# Altium PCB 电子脚铐手表主控板V3.PcbDoc
Units mm, origin at the board's own origin, x right, y up, seen from the top; angles counter-clockwise.
Board outline 36 x 30 mm, 2 copper layers (Top Layer, Bottom Layer), stack 1.071 mm thick; 57 components, 41 nets, 197 pads, 33 vias.
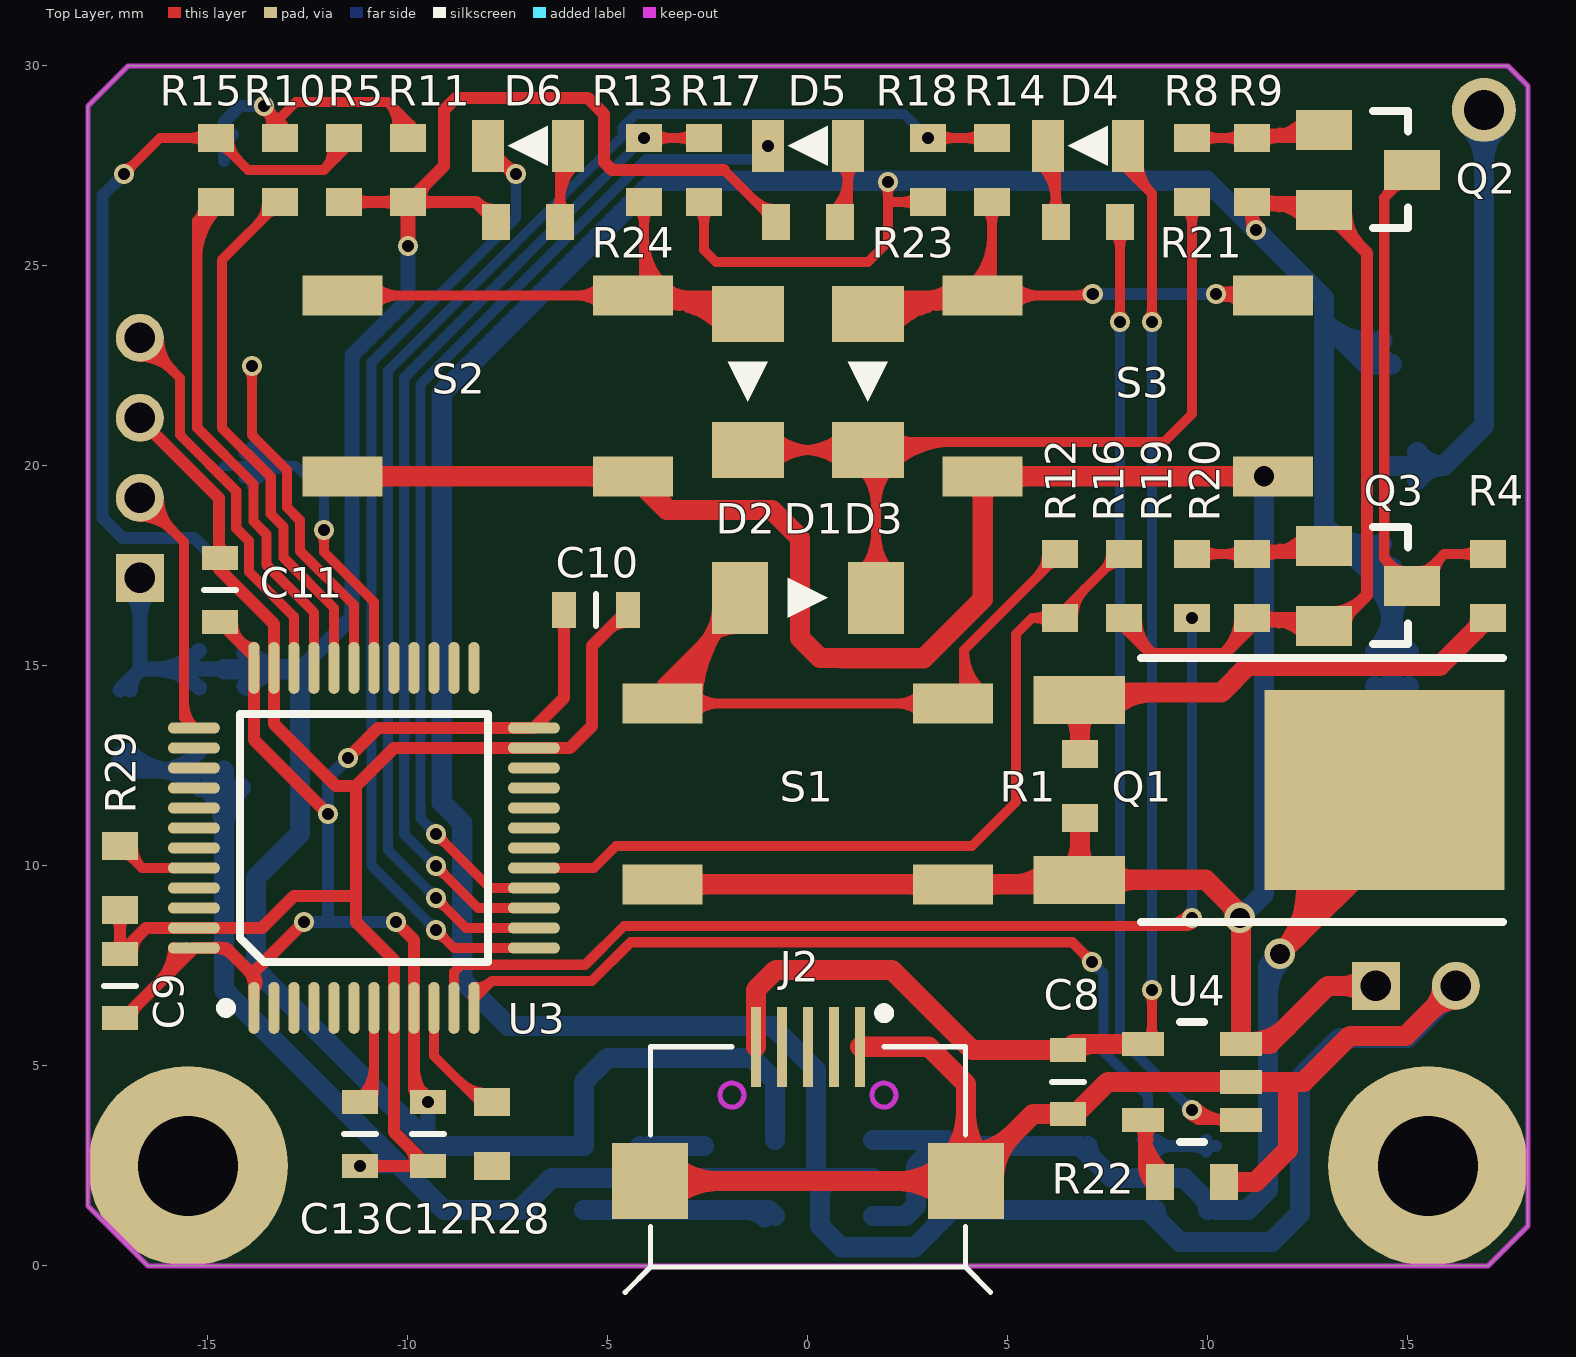
[diagram p0: Top Layer view]
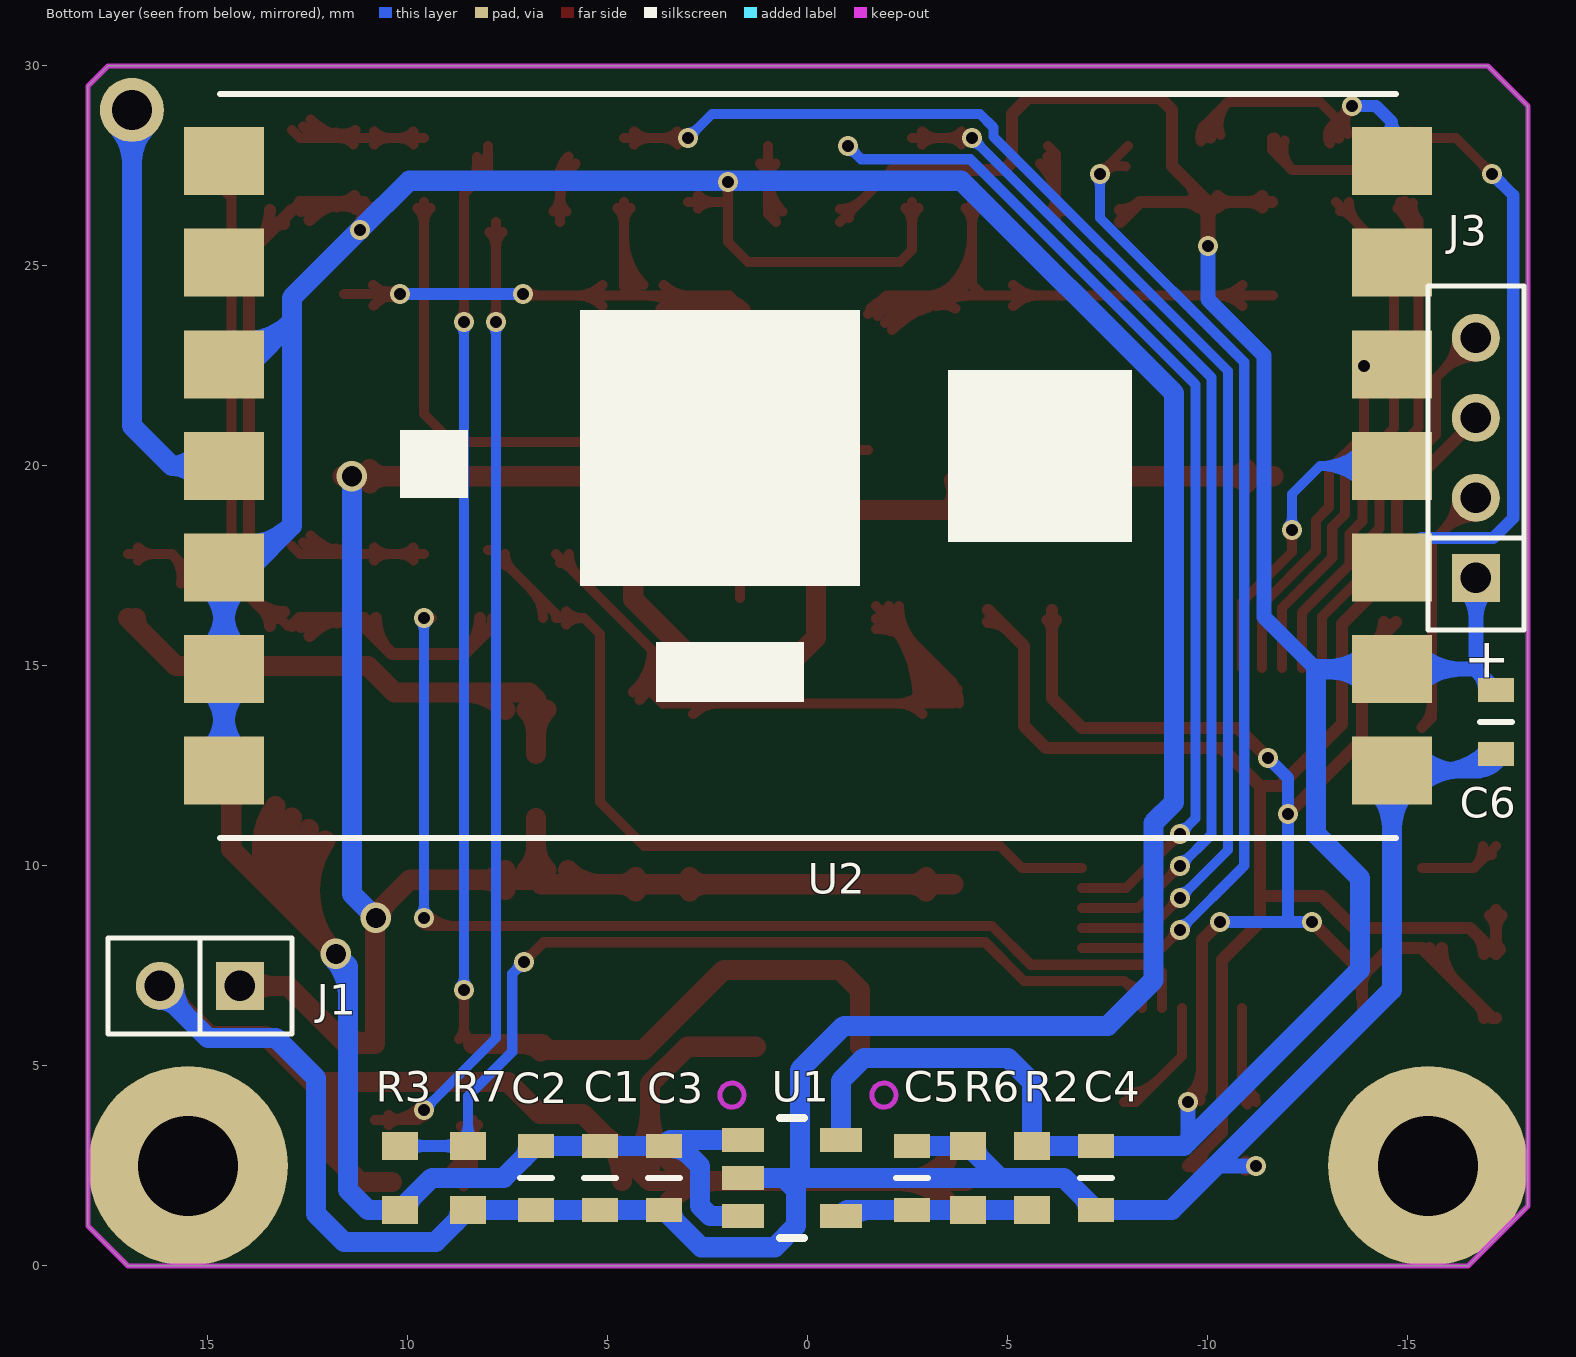
[diagram p1: Bottom Layer view, seen from below]
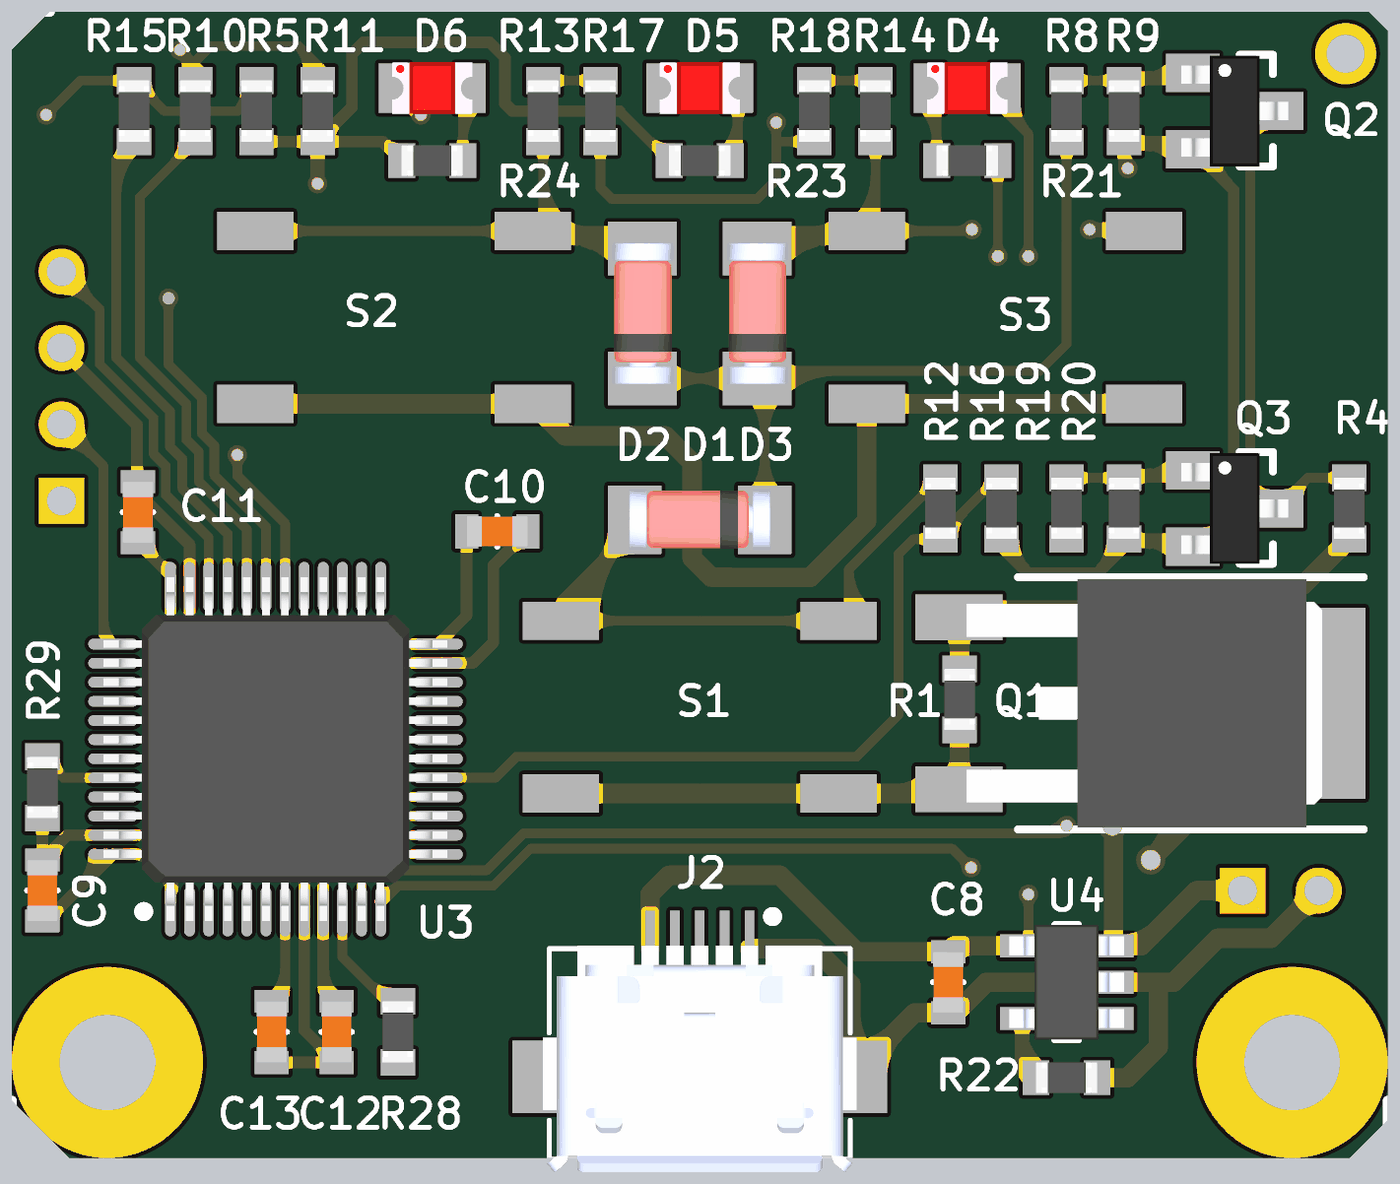
[diagram p2: 3D render of the assembled board from above, using the file's embedded part models]
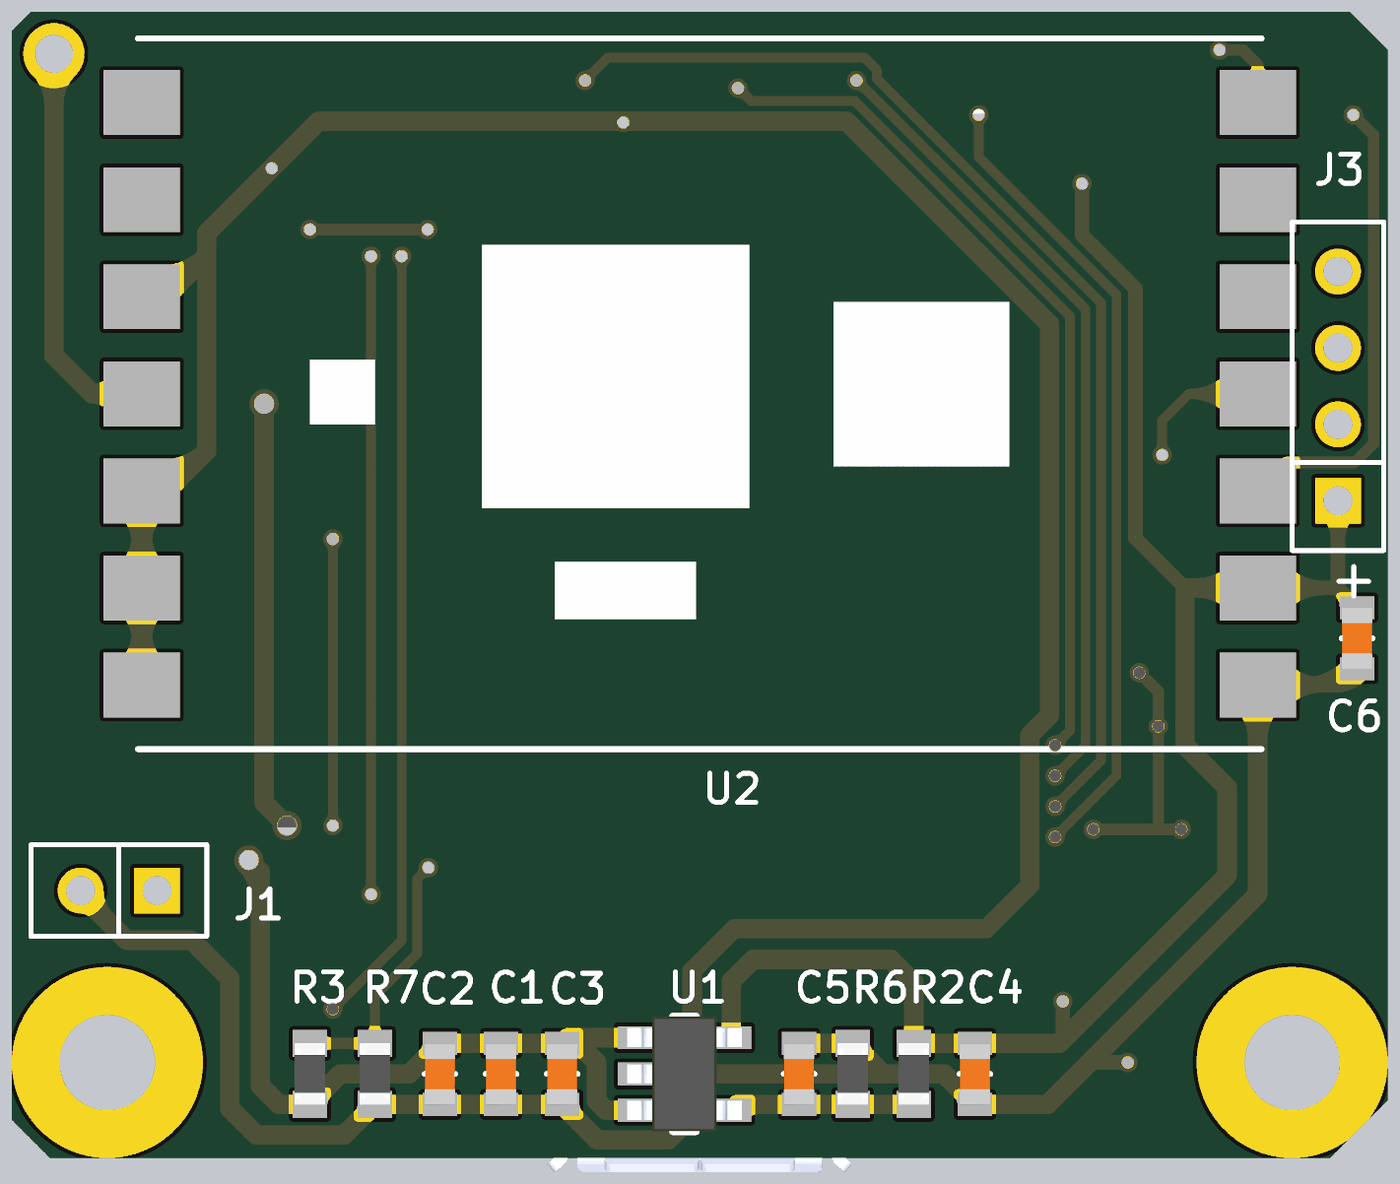
[diagram p3: 3D render of the assembled board from below, using the file's embedded part models]

## Layer stack, top to bottom
Top Solder: solder mask 0.0102, Solder Resist, Dk 3.5
Top Layer: signal copper 0.0356
Dielectric 1: dielectric 1, FR-4, Dk 4.8
Bottom Layer: signal copper 0.0356
Bottom Solder: solder mask 0.0102, Solder Resist, Dk 3.5

## Board outline
-18,1.5 -16.5,0 17,0 18,1 18,29.5 17.5,30 -17,30 -18,29

## Design rules (kind name [scope] priority, off if disabled: settings)
Clearance [All] p1: gap=0.152
ComponentClearance [All] p1: gap=0 collisioncheckmode=3 verticalgap=0 showdistances=FALSE
Height [All] p1: minheight=0 maxheight=50.8 prefheight=12.7
HoleSize [All] p1: absolutevalues=TRUE maxlimit=5.08 minlimit=0.025 maxpercent=80.000 minpercent=20.000
HoleToHoleClearance [All] p1: gap=0.152 allowstackedmicrovias=TRUE
MinimumSolderMaskSliver [All] p1: minsoldermaskwidth=0
PlaneConnect [All] p1: planeconnectstyle=Direct reliefexpansion=0.508 reliefentries=4 reliefconductorwidth=0.254 reliefairgap=0.254
PolygonConnect [All] p1: connectstyle=Direct reliefconductorwidth=0.254 reliefentries=4 polygonreliefangle="90 Angle" airgapwidth=0.254
RoutingVias [All] p1: holewidth=0.711 width=1.27 viastyle="Through Hole" minholewidth=0.203 minwidth=0.305 maxholewidth=5.08 maxwidth=7.62
SilkToSilkClearance [All] p1: silktosilkclearance=0
SilkToSolderMaskClearance [IsPad] p1: minsilkscreentomaskgap=0 clearancetoexposedcopper=TRUE
SolderMaskExpansion [All] p1: expansion=0.102
Width [All] p1: maxlimit=0.508 minlimit=0.254 preferedwidth=0.254
21 further rules are at their usual default settings.

## Components (designator, comment, footprint, x,y, rotation, side; value= is the part's Value field where it differs from the comment)
C1 "10uF" C0603 5.2,2.2 r270 bottom locked
C2 "10uF" C0603 6.8,2.2 r270 bottom locked
C3 "0.1uF" C0603 3.6,2.2 r90 bottom locked
C4 "10uF" C0603 -7.2,2.2 r270 bottom locked
C5 "470pF" C0603 -2.6,2.2 r90 bottom locked
C6 "10uF" C0603 -17.2,13.6 r270 bottom locked
C8 "Cap" C0603 6.5,4.6 r270 top locked
C9 "0.1uF" C0603 -17.2,7 r90 top locked
C10 "0.1uF" C0603 -5.3,16.4 r0 top locked
C11 "0.1uF" C0603 -14.7,16.9 r90 top locked
C12 "0.1uF" C0603 -9.5,3.3 r270 top locked
C13 "0.1uF" C0603 -11.2,3.3 r270 top locked
D1 "1N4148" SOD-80-S 0,16.7 r0 top locked
D2 "1N4148" SOD-80-S -1.5,22.1 r270 top locked
D3 "1N4148" SOD-80-S 1.5,22.1 r270 top locked
D4 "LED-G" LED0805 7,28 r180 top locked
D5 "LED" LED0805 0,28 r180 top locked
D6 "LED" LED0805 -7,28 r180 top locked
J1 "Jack 1x2" Jk1*2-2.0 15.2,7 r0 bottom locked
J2 "MicroUSB" MICRO-USB 0,3.8 r180 top locked
J3 "SHD1X4-2.00" Jk1*4-2.0 -16.7,20.2 r90 bottom locked
Q1 "2SA1615" TO-252 10.6,11.901 r270 top locked
Q2 "S8050" SOT-23 14,27.4 r270 top locked
Q3 "S8050" SOT-23 14,17 r270 top locked
R1 "200K" R0603 6.8,12 r90 top locked
R2 "100K" R0603 -5.6,2.2 r90 bottom locked
R3 "200K" R0603 10.2,2.2 r90 bottom locked
R4 "1K" R0603 17,17 r270 top locked
R5 "200K" R0603 -11.6,27.4 r270 top locked
R6 "160K" R0603 -4,2.2 r90 bottom locked
R7 "100K" R0603 8.5,2.2 r270 bottom locked
R8 "20K" R0603 9.6,27.4 r90 top locked
R9 "10K" R0603 11.1,27.4 r270 top locked
R10 "200K" R0603 -13.2,27.4 r270 top locked
R11 "200K" R0603 -10,27.4 r270 top locked
R12 "200K" R0603 6.3,17 r270 top locked
R13 "200K" R0603 -4.1,27.4 r90 top locked
R14 "200K" R0603 4.6,27.4 r90 top locked
R15 "200K" R0603 -14.8,27.4 r90 top locked
R16 "100K" R0603 7.9,17 r90 top locked
R17 "100K" R0603 -2.6,27.4 r90 top locked
R18 "100K" R0603 3,27.4 r90 top locked
R19 "20K" R0603 9.6,17 r90 top locked
R20 "10K" R0603 11.1,17 r270 top locked
R21 "1K" R0603 7,26.1 r180 top locked
R22 "1.65K" R0603 9.6,2.1 r180 top locked
R23 "1K" R0603 0,26.1 r0 top locked
R24 "1K" R0603 -7,26.1 r0 top locked
R28 "NC" R0603 -7.9,3.3 r90 top locked
R29 "100K" R0603 -17.2,9.7 r270 top locked
S1 "Switch" SW-6X6X8 0,11.8 r0 top locked
S2 "Switch" SW-6X6X8 -8,22 r0 top locked
S3 "Switch" SW-6X6X8 8,22 r0 top locked
U1 "MIC5219YM5" SOT-23-5 0.4,2.2 r180 bottom locked
U2 "YL-800TS" YL-800TS 0,20 r0 bottom locked
U3 "STM32F103CB" LQFP48 -11.1,10.7 r90 top locked
U4 "SE9016" SOT-23-5 9.6,4.6 r180 top locked

## Footprints (in the part's own frame and the unit in brackets; to place one, negate y for a bottom-side part, rotate by r counter-clockwise, add the part's x,y. Pads: shape width x height; smd on the part's side, far side on the other; paste and mask are expansions set on the pad)
C0603 [mm]
  rect 0.6x0.9 smd: 1(-0.8,0) 2(0.8,0)
  silkscreen extent 0,-0.4 0,0.4, body extent -0.8,-0.4 0.8,0.4, height 0.5
Jk1*2-2.0 [mm]
  rect 1.2x1.2 hole 0.762: 1(-1,0)
  round 1.2 hole 0.762: 2(1,0)
  silkscreen extent -2.3,-1.2 2.3,1.2
Jk1*4-2.0 [mm] "4P，直插，2.0mm间距，排母"
  rect 1.2x1.2 hole 0.762: 1(-3,0)
  round 1.2 hole 0.762: 2(-1,0) 3(1,0) 4(3,0)
  silkscreen extent -4.3,-1.2 4.3,1.2, body extent -4.25,-1.22 4.25,1.18, height 4.3
LED0805 [mm]
  rect 0.8x1.3 smd: 1(-1,0) 2(1,0)
  silkscreen extent -0.5,-0.5 0.5,0.5, body extent -1.05,-0.68 1.05,0.67, height 0.8
LQFP48 [mm]
  oval 1.3x0.28 smd: 1(-4.25,2.75) 2(-4.25,2.25) 3(-4.25,1.75) 4(-4.25,1.25) 5(-4.25,0.75) 6(-4.25,0.25) 7(-4.25,-0.25) 8(-4.25,-0.75) 9(-4.25,-1.25) 10(-4.25,-1.75) 11(-4.25,-2.25) 12(-4.25,-2.75) 25(4.25,-2.75) 26(4.25,-2.25) 27(4.25,-1.75) 28(4.25,-1.25) 29(4.25,-0.75) 30(4.25,-0.25) 31(4.25,0.25) 32(4.25,0.75) 33(4.25,1.25) 34(4.25,1.75) 35(4.25,2.25) 36(4.25,2.75)
  oval 0.28x1.3 smd: 13(-2.75,-4.25) 14(-2.25,-4.25) 15(-1.75,-4.25) 16(-1.25,-4.25) 17(-0.75,-4.25) 18(-0.25,-4.25) 19(0.25,-4.25) 20(0.75,-4.25) 21(1.25,-4.25) 22(1.75,-4.25) 23(2.25,-4.25) 24(2.75,-4.25) 37(2.75,4.25) 38(2.25,4.25) 39(1.75,4.25) 40(1.25,4.25) 41(0.75,4.25) 42(0.25,4.25) 43(-0.25,4.25) 44(-0.75,4.25) 45(-1.25,4.25) 46(-1.75,4.25) 47(-2.25,4.25) 48(-2.75,4.25)
  silkscreen extent -4.37,-3.1 3.1,3.57, body extent -4.49,-4.5 4.51,4.5, height 1.8
MICRO-USB [mm]
  rect 0.25x2 smd: 1(1.3,-1.679) 2(0.65,-1.679) 3(0,-1.679) 4(-0.65,-1.679) 5(-1.3,-1.679)
  rect 1.9x1.9 smd: 5(-3.95,1.679) 5(3.95,1.679)
  Keep-Out Layer circle w0.127: c1.9,-0.471 r0.3
  Keep-Out Layer circle w0.127: c-1.9,-0.471 r0.3
  silkscreen extent -4.57,-2.64 4.57,4.46, body extent -4.1,-1.75 4.1,4.18, height 2.77
R0603 [mm]
  rect 0.7x0.9 smd: 1(-0.8,0) 2(0.8,0)
  body extent -0.8,-0.4 0.8,0.4, height 0.37
SOD-80-S [mm]
  rect 1.4x1.8 smd: 1(-1.7,0) 2(1.7,0)
  silkscreen extent -0.5,-0.5 0.5,0.5, body extent -1.85,-0.79 1.85,0.81, height 1.6
SOT-23 [mm]
  rect 1x1.4 smd: 1(-1,-1.1) 2(1,-1.1) 3(0,1.1)
  silkscreen extent -1.47,0.13 1.45,1, body extent -1.45,-1.4 1.45,1.4, height 1.3
SOT-23-5 [mm]
  rect 1.05x0.6 smd: 1(-1.225,0.95) 2(-1.225,0) 3(-1.225,-0.95) 4(1.225,-0.95) 5(1.225,0.95)
  silkscreen extent -0.3,-1.5 0.3,1.5, body extent -1.5,-1.5 1.5,1.5, height 1.2
SW-6X6X8 [mm]
  rect 2x1 smd: 1(-3.63,-2.261) 1(3.63,-2.261) 2(-3.63,2.261) 2(3.63,2.261)
  body extent -4.26,-3.18 4.44,2.97, height 8.1
TO-252 [mm]
  rect 1.2x2.28 smd: 1(-2.25,-3.816) 3(2.25,-3.816)
  rect 5x6 smd: 2(0,3.816)
  silkscreen extent -3.3,-2.27 3.3,6.78, body extent -3.25,-3.62 3.25,5.68, height 2.3
YL-800TS [mm]
  rect 2x1.7 smd: 1(-14.6,7.62) 2(-14.6,5.08) 3(-14.6,2.54) 4(-14.6,0) 5(-14.6,-2.54) 6(-14.6,-5.08) 7(-14.6,-7.62) 8(14.6,-7.62) 9(14.6,-5.08) 10(14.6,-2.54) 11(14.6,0) 12(14.6,2.54) 13(14.6,5.08) 14(14.6,7.62)
  silkscreen extent -14.7,-9.3 14.7,9.3, body extent -14.7,-9.3 14.7,9.3, height 2.3

## Part data
C1 C2 C4 C5 C6: library part CAP, "CAP"
C3 C9 C10 C11 C12 C13: library part "Cap Semi"
C8: "Capacitor"
D1 D2 D3: library part DIODE-SWITCHING, "Silicon Epitaxial Planar Diodes"
D4: library part LED
J1: "插座"
J3: library part HEADER1X4
Q1: library part MJD122
Q2 Q3: "NPN triode, 0.5A Max"
R1 R2 R3 R6 R7 R8 R9 R12 R13 R14 R19 R20 R28 R29: library part Res
R4 R5 R10 R11 R15 R16 R17 R18: library part RES, "Resistor"
R21 R22 R23 R24: library part Res, "Resistor"
S1 S2 S3: library part Sw
U1: library part MIC5205
U3: library part STM32F103Cx

## Free pads (board coordinates)
  round 5 hole 2.5: ""(-15.5,2.5) ""(15.5,2.5)
  round 1.6 hole 1: ""(16.9,28.9)

## Via types
v1: diameter 0.508, hole 0.305, Top Layer to Bottom Layer, tented both sides, 30 vias
v2: diameter 0.762, hole 0.508, Top Layer to Bottom Layer, tented both sides, 3 vias

## Nets (pads, with @x,y where several pads share a name; then routed paths per layer and width w, separated by ;. In a path a pad name is that pad's centre, name@x,y a point inside that pad or via, vN(x,y) a via of type N, cw(c..) or ccw(c..) an arc to the next point about the centre after c; other vN are vias at no path point)
+3.3V: C4.1 C6.1 C9.1 C10.1 C11.1 C12.1 J3.1 R2.2 R5.2 R11.2 R23.1 R24.1 U1.5 U2.2 U3.1 U3.9 U3.24 U3.36 U3.48 | length 114.8
  Top Layer w0.254: U3.48@-15.45,7.95 U3.48 ; U3.1 U3.1@-13.85,6.7 ; -2.1,27.4 R23.1 ; -1.351,26.651 ccw(c-0.8,27.203) R23.1@-0.8,26.423 ; R23.1@-1.11,26.41 cw(c-1.32,26.2) R23.1@-1.023,26.2
  Top Layer w0.305: C9.1 -17.1,6.2 U3.48 -14.55,7.95 -13.85,7.25 ; C9.1@-16.902,6.2 cw(c-16.425,6.2) -16.763,6.537 ; -16.199,7.101 ccw(c-17.049,7.95) U3.48@-15.848,7.95 ; -15.679,7.621 ccw(c-16.008,7.95) U3.48@-15.543,7.95 ; U3.48@-14.84,7.962 cw(c-14.84,7.292) -14.366,7.766 ; C11.1 -13.85,15.25 U3.36 -13.85,13.15 v1(-12,11.3) ; C11.1@-14.402,16.1 ccw(c-13.684,16.1) -14.192,15.592 ; -14.187,15.587 ccw(c-13.85,15.925) U3.36@-13.85,15.448 ; -14.034,7.434 cw(c-14.508,6.96) U3.1@-13.838,6.96 ; U3.1@-13.85,6.7 -13.85,7.25 ; U3.1@-13.841,6.952 ccw(c-14.004,7.096) -13.85,7.25 ; v1(-12.6,8.6) -13.85,7.35 -13.85,7.25 ; R5.2 R11.2 ; v1(-11.5,12.7) -10.75,13.45 U3.24 -6.1,14.2 C10.1 ; R5.2@-11.36,26.46 cw(c-11.023,26.123) -11.023,26.6 cw(c-11.023,27.077) R5.2@-11.36,26.74 ; v1(-10.3,8.6) -9.85,8.15 U3.9 -9.85,4.45 ; R11.2@-10.24,26.46 ccw(c-10.577,26.123) -10.577,26.6 ccw(c-10.577,27.077) R11.2@-10.24,26.74 ; -9.85,4.939 ccw(c-8.811,4.939) C12.1@-9.546,4.204 ; C12.1@-9.788,4.153 ccw(c-10.046,4.254) -9.85,4.45 ; R11.2@-9.76,26.46 cw(c-9.423,26.123) -9.423,26.6 cw(c-9.423,27.077) R11.2@-9.76,26.74 ; R11.2@-9.702,26.6 cw(c-8.984,26.6) -9.492,27.108 ; C12.1@-9.649,4.248 cw(c-9.648,4.45) -9.85,4.45 ; C12.1@-9.627,4.345 cw(c-9.877,4.201) C12.1@-9.598,4.126 ; v1(-9.5,4.1) -9.85,4.45 ; R24.1@-7.803,26.398 cw(c-7.811,27.089) -8.3,26.6 ; R24.1 -8.3,26.6 ; C10.1@-6.204,16.146 cw(c-6.456,15.894) -6.1,15.894 cw(c-5.744,15.894) C10.1@-5.996,16.146 ; -2.1,27.4 -4.9,27.4 -5.1,27.6 -5.1,28.8 -5.5,29.2 -8.8,29.2 -9.1,28.9 -9.1,27.5 R11.2 ; R11.2 -8.3,26.6
  Top Layer w0.381: R11.2@-10.113,26.487 cw(c-10.385,26.215) -10,26.215 cw(c-9.615,26.215) R11.2@-9.887,26.487 ; v1(-10,25.5) R11.2
  Bottom Layer w0.305: v1(-12.6,8.6) -12,8.6 ; v1(-11.5,12.7) -12,12.2 v1(-12,11.3) -12,8.6 ; v1(-10.3,8.6) -12,8.6
  Bottom Layer w0.381: C6.1 -16.68,14.92 U2.2 ; J3.1@-16.99,16.91 cw(c-17.689,16.211) -16.7,16.211 cw(c-15.711,16.211) J3.1@-16.41,16.91 ; C6.1@-16.941,14.4 cw(c-16.314,14.4) -16.757,14.843 ; -16.7,14.94 J3.1 ; U2.2@-15.216,14.454 ccw(c-16.342,13.328) -16.342,14.92 ccw(c-16.342,16.512) U2.2@-15.216,15.386 ; -12.7,14.92 -11.4,16.22 -11.4,22.765 -10,24.165 v1(-10,25.5) ; -9.5,3.1 v1(-9.5,4.1)
  Bottom Layer w0.508: U2.2 -12.7,14.92 -12.7,10.8 -13.8,9.7 -13.8,7.4 -9.5,3.1 -9.4,3 C4.1 R2.2 -5.6,4.6 -5,5.2 -1.4,5.2 -0.825,4.625 U1.5 ; U2.2@-14.029,14.499 cw(c-13.011,13.481) -13.011,14.92 cw(c-13.011,16.359) U2.2@-14.029,15.341
AD_KEY1: R12.2 R16.2 U3.17 | length 23.2
  Top Layer w0.254: U3.17 -5.35,9.95 -4.8,10.5 4.1,10.5 5.2,11.6 5.2,15.8 5.6,16.2 R12.2 6.3,16.3 7.9,17.9 R16.2@8,17.9 ; R12.2@6.042,16.042 ccw(c5.662,15.662) 5.662,16.2 ccw(c5.662,16.738) R12.2@6.042,16.358 ; R12.2@6.623,16.2 cw(c7.644,16.2) 6.922,16.922 ; R16.2@7.577,17.8 cw(c7.039,17.8) 7.419,17.419 cw(c7.8,17.039) R16.2@7.8,17.577
AD_KEY2: R13.2 R17.2 U3.15 | length 29
  Top Layer w0.254: v1@-9.3,9.873 cw(c-9.3,9.566) -9.083,9.783 cw(c-8.866,10) v1@-9.173,10 ; v1(-9.3,10) -8.25,8.95 U3.15 ; v1(-4.1,28.2) R17.2 ; R13.2@-4.01,28.11 cw(c-3.793,27.893) -3.793,28.2 cw(c-3.793,28.507) R13.2@-4.01,28.29 ; R13.2@-3.842,28.042 cw(c-3.462,27.662) -3.462,28.2 cw(c-3.462,28.738) R13.2@-3.842,28.358 ; R17.2@-2.858,28.042 ccw(c-3.238,27.662) -3.238,28.2 ccw(c-3.238,28.738) R17.2@-2.858,28.358
  Bottom Layer w0.254: v1@-9.427,10 ccw(c-9.734,10) -9.517,10.217 ccw(c-9.3,10.434) v1@-9.3,10.127 ; v1(-9.3,10) -10.094,10.794 -10.094,22.206 v1(-4.1,28.2) ; v1@-4.227,28.2 cw(c-4.534,28.2) -4.317,27.983 cw(c-4.1,27.766) v1@-4.1,28.073
AD_KEY3: R14.2 R18.2 U3.14 | length 38.2
  Top Layer w0.254: v1@-9.3,9.073 cw(c-9.3,8.766) -9.083,8.983 cw(c-8.866,9.2) v1@-9.173,9.2 ; v1(-9.3,9.2) -8.55,8.45 U3.14 ; v1(3,28.2) R14.2 ; R18.2@3.09,28.11 cw(c3.307,27.893) 3.307,28.2 cw(c3.307,28.507) R18.2@3.09,28.29 ; R18.2@3.258,28.042 cw(c3.638,27.662) 3.638,28.2 cw(c3.638,28.738) R18.2@3.258,28.358 ; R14.2@4.342,28.042 ccw(c3.962,27.662) 3.962,28.2 ccw(c3.962,28.738) R14.2@4.342,28.358
  Bottom Layer w0.254: v1@-9.427,9.2 ccw(c-9.734,9.2) -9.517,9.417 ccw(c-9.3,9.634) v1@-9.3,9.327 ; v1(-9.3,9.2) -10.5,10.4 -10.5,22.375 -4.637,28.237 -4.637,28.463 -4.3,28.8 2.4,28.8 v1(3,28.2) ; v1@2.873,28.2 ccw(c2.566,28.2) 2.783,28.417 ccw(c3,28.634) v1@3,28.327
ADPOW: R3.2 R7.1 U3.12 | length 27.3
  Top Layer w0.254: U3.12@-8.382,6.721 ccw(c-8.363,6.862) U3.12@-8.263,6.762 ; U3.12 -8.35,6.674 -7.9,7.124 ; U3.12@-8.348,6.973 ccw(c-8.277,7.501) -7.9,7.124 ; v1@6.973,7.6 ccw(c6.666,7.6) 6.883,7.817 ccw(c7.1,8.034) v1@7.1,7.727 ; v1(7.1,7.6) 6.606,8.094 -4.432,8.094 -5.401,7.124 -7.9,7.124
  Bottom Layer w0.254: v1@7.1,7.473 cw(c7.1,7.166) 7.317,7.383 cw(c7.534,7.6) v1@7.227,7.6 ; v1(7.1,7.6) 7.394,7.306 7.394,5.352 8.5,4.246 R7.1 ; R7.1@8.342,3.158 ccw(c7.962,3.538) 8.5,3.538 ccw(c9.038,3.538) R7.1@8.658,3.158
  Bottom Layer w0.305: R7.1 R3.2 ; R7.1@8.74,2.86 cw(c9.077,2.523) 9.077,3 cw(c9.077,3.477) R7.1@8.74,3.14 ; R3.2@9.96,2.86 ccw(c9.623,2.523) 9.623,3 ccw(c9.623,3.477) R3.2@9.96,3.14
ANT: pad.@16.9,28.9 U2.11 | length 14.2
  Bottom Layer w0.508: U2.11 15.9,20 ; U2.11@15.237,19.656 cw(c15.9,19.189) 15.9,20 ; U2.11@15.237,20.344 ccw(c15.9,20.811) 15.9,20 ; pad.@16.514,28.514 cw(c15.582,27.582) 16.9,27.582 cw(c18.218,27.582) pad.@17.286,28.514 ; pad.@16.9,28.9 16.9,21 15.9,20
BAT: J1.1 Q1.3 R1.1 S1.1 S2.1 S3.1 U4.3 | length 79.7
  Top Layer w0.508: S2.1@-11.63,19.739 -4.37,19.739 -3.531,18.9 ; S2.1@-10.956,19.565 cw(c-10.536,19.146) -10.536,19.739 cw(c-10.536,20.333) S2.1@-10.956,19.913 ; S2.1@-5.044,19.565 ccw(c-5.464,19.146) -5.464,19.739 ccw(c-5.464,20.333) S2.1@-5.044,19.913 ; S2.1@-3.65,19.63 ccw(c-3.083,19.348) -3.531,18.9 ; S1.1@-3.63,9.539 3.63,9.539 6.672,9.539 Q1.3 ; S1.1@-2.956,9.365 cw(c-2.536,8.946) -2.536,9.539 cw(c-2.536,10.133) S1.1@-2.956,9.713 ; S1.1@2.956,9.365 ccw(c2.536,8.946) 2.536,9.539 ccw(c2.536,10.133) S1.1@2.956,9.713 ; S3.1@4.196,19.565 cw(c3.776,19.146) 4.37,19.146 cw(c4.964,19.146) S3.1@4.544,19.565 ; S1.1@4.304,9.365 cw(c4.724,8.946) 4.724,9.539 cw(c4.724,10.133) S1.1@4.304,9.713 ; S3.1@5.044,19.565 cw(c5.464,19.146) 5.464,19.739 cw(c5.464,20.333) S3.1@5.044,19.913 ; 5.138,9.539 ccw(c5.138,10.757) Q1.3@5.999,9.896 ; Q1.3@6.539,9.896 ccw(c5.91,10.525) 6.8,10.525 ; 6.8,10.448 ccw(c7.581,10.448) Q1.3@7.029,9.896 ; R1.1 6.8,9.667 Q1.3 ; Q1.3@7.569,9.407 cw(c8.159,8.816) 8.159,9.651 cw(c8.159,10.487) Q1.3@7.569,9.896 ; 10.512,9.088 cw(c10.125,8.7) v2@10.673,8.7 ; v2@10.825,8.7 U4.3 11.55,5.55 13,7 J1.1 ; v2@10.825,8.775 9.949,9.651 Q1.3 ; S3.1@10.956,19.565 ccw(c10.536,19.146) 10.536,19.739 ccw(c10.536,20.333) S3.1@10.956,19.913 ; U4.3@11.05,5.596 ccw(c11.05,6.914) 11.982,5.982 ; S3.1@11.63,19.739 v2(11.4,19.739) 4.37,19.739 4.37,16.67 2.894,15.194 0.832,15.194 0.825,15.2 0.3,15.2 -0.2,15.7 -0.2,18.2 -0.9,18.9 -3.531,18.9 ; J1.1@13.955,6.755 ccw(c13.365,6.165) 13.365,7 ccw(c13.365,7.835) J1.1@13.955,7.245
  Bottom Layer w0.508: v2(10.8,8.7) 11.4,9.3 v2(11.4,19.739)
BATOUT: C1.1 C2.1 C3.2 Q1.2 R3.1 U1.1 U1.3 | length 39.5
  Top Layer w0.508: Q1.2@12.063,10.633 cw(c10.226,9.375) v2(11.8,7.8) 14.416,10.416 Q1.2 ; 12.233,8.233 ccw(c10.739,9.726) Q1.2@12.482,10.92 ; 12.665,8.665 ccw(c11.253,10.078) Q1.2@12.901,11.207 ; 13.098,9.098 ccw(c11.767,10.43) Q1.2@13.32,11.494
  Bottom Layer w0.508: U1.3 2.45,1.25 2.7,1.5 2.7,2.5 3.2,3 C3.2 ; U1.1 3.45,3.15 C3.2 ; 2.945,2.745 cw(c3.45,2.239) C3.2@3.45,2.954 ; 2.977,3.15 cw(c2.977,2.527) C3.2@3.417,2.967 ; C2.1@6.996,3 ccw(c7.469,3) 7.135,2.665 ; R3.1@9.865,1.735 cw(c9.531,1.4) R3.1@10.004,1.4 ; 11.5,6.769 cw(c12.831,6.769) v2@11.89,7.71 ; v2(11.8,7.8) 11.5,7.5 11.5,1.9 11,1.4 R3.1 9.4,2.2 7.6,2.2 C2.1 C1.1 C3.2
BOOT0: R29.1 U3.44 | length 2.9
  Top Layer w0.254: R29.1 -16.65,9.95 ; R29.1@-17.1,10.277 cw(c-17.1,9.98) R29.1@-16.89,10.19 ; R29.1@-16.877,10.5 ccw(c-16.102,10.498) -16.65,9.95 ; U3.44 -16.65,9.95
GND: C1.2 C2.2 C3.1 C4.2 C5.2 C6.2 C8.2 C9.2 C10.2 C11.2 C12.2 C13.2 J1.2 J2.5 J3.3 Q2.2 Q3.2 R6.2 R7.2 R9.2 R16.1 R17.1 R18.1 R20.2 R22.1 R29.2 U1.2 U2.1 U2.10 U2.12 U2.13 U2.14 U3.8 U3.23 U3.35 U3.47 U4.2 | length 277.6
  Top Layer w0.254: J3.3 J3.3@-16.5,21 ; R17.1@-2.758,26.442 cw(c-3.138,26.062) -2.6,26.062 cw(c-2.062,26.062) R17.1@-2.442,26.442 ; R17.1 -2.6,25.4 -2.3,25.1 1.5,25.1 2,25.6 2,26.6 ; v1@1.91,27.01 cw(c1.693,26.793) 2,26.793 cw(c2.307,26.793) v1@2.09,27.01 ; v1(2,27.1) 2,26.6 ; R18.1@2.742,26.442 ccw(c2.362,26.062) 2.362,26.6 ccw(c2.362,27.138) R18.1@2.742,26.758 ; R18.1 2,26.6 ; R16.1@7.9,16 R16.1 ; Q2.2@12.7,26.6 Q2.2 ; Q3.2 13,16 Q3.2@13.2,16.2
  Top Layer w0.305: R29.2@-17.34,8.76 cw(c-17.677,8.423) -17.2,8.423 cw(c-16.723,8.423) R29.2@-17.06,8.76 ; C9.2@-17.304,7.904 ccw(c-17.556,8.156) -17.2,8.156 ccw(c-16.844,8.156) C9.2@-17.096,7.904 ; R29.2 C9.2 -16.55,8.45 U3.47 -13.65,8.45 -12.85,9.25 -11.3,9.25 ; C9.2@-16.902,7.8 cw(c-16.184,7.8) -16.692,8.308 ; J3.3@-16.5,21 -16.5,20.964 -14.725,19.189 -14.725,17.425 -13.35,16.05 U3.35 -13.35,13.55 -11.8,12 -11.3,12 ; -14.725,18.118 ccw(c-14.282,18.118) C11.2@-14.596,17.804 ; v1(-11.2,2.5) C12.2 -10.35,3.35 U3.8 -10.35,7.65 -11.3,8.6 -11.3,9.25 ; C13.2@-10.946,2.396 cw(c-10.694,2.144) -10.694,2.5 cw(c-10.694,2.856) C13.2@-10.946,2.604 ; -10.008,3.008 cw(c-10.516,2.5) C12.2@-9.798,2.5 ; C12.2@-9.754,2.396 ccw(c-10.006,2.144) -10.006,2.5 ccw(c-10.006,2.856) C12.2@-9.754,2.604 ; -5.008,15.892 cw(c-4.5,15.384) C10.2@-4.5,16.102 ; C10.2 -5.4,15.5 -5.4,13.5 -5.95,12.95 U3.23 -10.35,12.95 -11.3,12 ; R16.1@7.9,16 8.6,15.3 10.4,15.3 11.1,16 R20.2 12.7,16.2 Q3.2 ; R16.1@8.198,16.2 ccw(c9.399,16.2) 8.549,15.351 ; 10.451,15.351 ccw(c9.601,16.2) R20.2@10.802,16.2 ; R9.2@10.96,26.46 cw(c10.623,26.123) 11.1,26.123 cw(c11.577,26.123) R9.2@11.24,26.46 ; 11.075,26.218 ccw(c11.44,26.315) v1@11.251,25.988 ; R9.2@11.1,26.387 ccw(c11.687,26.387) v1@11.272,25.972 ; v1(11.2,25.9) 11.1,26 R9.2 Q2.2@12.7,26.6 ; R20.2@11.299,16.029 cw(c11.616,15.48) 11.78,16.092 ; R9.2@11.299,26.429 cw(c11.616,25.88) 11.78,26.492 ; R20.2@11.34,16.06 cw(c11.677,15.723) 11.677,16.2 cw(c11.677,16.677) R20.2@11.34,16.34 ; R9.2@11.34,26.46 cw(c11.677,26.123) 11.677,26.6 cw(c11.677,27.077) R9.2@11.34,26.74 ; R20.2@11.371,16.299 ccw(c11.648,16.459) 11.565,16.15 ; R9.2@11.371,26.699 ccw(c11.648,26.859) 11.565,26.55 ; R20.2@11.378,16.2 cw(c11.378,14.678) Q3.2@12.454,15.754 ; R9.2@11.378,26.6 cw(c11.378,25.078) Q2.2@12.454,26.154 ; 12.114,16.2 cw(c12.114,15.414) Q3.2@12.67,15.97 ; 12.114,26.6 cw(c12.114,25.814) Q2.2@12.67,26.37 ; Q2.2 13.975,25.325 13.975,16.775 13.4,16.2 Q3.2@13.2,16.2 ; Q3.2@13.1,16.348 ccw(c13.1,17.428) 13.864,16.664 ; Q2.2@13.1,26.052 cw(c13.1,25.696) Q2.2@13.352,25.948 ; Q3.2@13.448,16 cw(c14.045,16) 13.623,16.423 ; Q2.2@13.448,26.4 ccw(c14.77,26.4) 13.835,25.465 ; -11.3,9.25 -11.3,12
  Top Layer w0.508: J2.5@-3.95,2.121 J2.5@3.95,2.121 ; J2.5@-3.458,1.629 cw(c-2.27,0.441) -2.27,2.121 cw(c-2.27,3.801) J2.5@-3.458,2.613 ; J2.5@1.3,5.479 3.021,5.479 3.95,4.55 J2.5@3.95,2.121 ; J2.5@3.458,1.629 ccw(c2.27,0.441) 2.27,2.121 ccw(c2.27,3.801) 3.458,2.613 ccw(c2.27,3.801) 3.95,3.801 ccw(c5.63,3.801) J2.5@4.442,2.613 ; J2.5@3.95,2.817 ccw(c3.95,4.497) 5.138,3.309 ccw(c6.326,2.121) J2.5@4.646,2.121 ; R22.1 11.2,2.1 12,2.9 12,4.6 ; J1.2@15.854,7 cw(c15.019,7) 15.609,6.409 cw(c16.2,5.819) J1.2@16.2,6.654 ; J1.2 14.95,5.75 13.55,5.75 12.4,4.6 12,4.6 ; J2.5@3.95,2.121 5.629,3.8 6.7,3.8 7.5,4.6 U4.2 12,4.6
  Bottom Layer w0.381: C6.2@-17.242,12.608 ccw(c-16.691,13.159) -16.691,12.38 ; C6.2 -16.78,12.38 ; C6.2@-16.973,12.877 ccw(c-15.772,14.078) -15.772,12.38 ; C6.2@-16.941,12.795 ccw(c-16.391,12.769) -16.78,12.38 ; U2.1@-15.216,11.914 ccw(c-16.342,10.788) -16.342,12.38 ccw(c-16.342,13.972) U2.1@-15.216,12.846 ; U2.1 -16.78,12.38 ; v1(-11.2,2.5) -10.2,2.5
  Bottom Layer w0.508: U2.1@-15.021,11.959 cw(c-16.039,10.941) -14.6,10.941 cw(c-13.161,10.941) U2.1@-14.179,11.959 ; U2.1 -14.6,6.9 -10.2,2.5 -9.1,1.4 C4.2 -6.4,2.2 -4.8,2.2 ; C4.2@-7.004,1.4 cw(c-6.531,1.4) -6.865,1.735 ; R6.2@-4.335,2.665 ccw(c-4.669,3) R6.2@-4.196,3 ; C5.2 R6.2 -4.8,2.2 ; U1.2 0.6,2.2 ; 3.265,1.065 ccw(c2.931,1.4) C3.1@3.404,1.4 ; R7.2@8.696,1.4 ccw(c9.169,1.4) R7.2@8.835,1.065 ; 12.9,18.5 ccw(c14.056,19.656) U2.12@14.345,18.047 ; 12.9,23.6 ccw(c14.089,24.789) U2.10@14.356,23.128 ; 13.588,17.812 ccw(c14.265,18.49) U2.12@14.434,17.547 ; U2.10@13.603,22.897 ccw(c14.284,23.577) U2.10@14.436,22.627 ; U2.14@14.179,12.801 ccw(c13.161,13.819) 14.6,13.819 ccw(c16.039,13.819) U2.14@15.021,12.801 ; U2.13@14.179,14.499 cw(c13.161,13.481) 14.6,13.481 cw(c16.039,13.481) U2.13@15.021,14.499 ; U2.13@14.179,15.341 ccw(c13.161,16.359) 14.6,16.359 ccw(c16.039,16.359) U2.13@15.021,15.341 ; U2.12@14.179,17.039 cw(c13.161,16.021) 14.6,16.021 cw(c16.039,16.021) U2.12@15.021,17.039 ; U2.14 U2.13 U2.12 13.94,17.46 12.9,18.5 12.9,23.6 ; U2.10 13.96,22.54 12.9,23.6 ; 15.539,6.239 ccw(c14.777,7) J1.2@15.854,7 ; 15.78,6.48 cw(c16.2,6.06) J1.2@16.2,6.654 ; J1.2 16.2,6.9 15,5.7 13.3,5.7 12.3,4.7 12.3,1.3 11.6,0.6 9.3,0.6 R7.2 C2.2 C1.2 C3.1 2.67,0.47 0.83,0.47 0.3,1 0.3,1.9 0.6,2.2 ; -4.8,2.2 0.2,2.2 ; 0.2,2.2 0.6,2.2 ; 0.2,2.2 0.2,4.9 -0.9,6 -7.5,6 -8.64,7.14 -8.64,11.074 -9.154,11.588 -9.154,21.817 -3.838,27.133 9.967,27.133 v1(11.2,25.9) 12.9,24.2 12.9,23.6
LEDKEY: D5.2 U3.16 | length 27
  Top Layer w0.254: v1@-9.3,10.673 cw(c-9.3,10.366) -9.083,10.583 cw(c-8.866,10.8) v1@-9.173,10.8 ; v1(-9.3,10.8) -7.95,9.45 U3.16
  Bottom Layer w0.254: v1@-9.427,10.8 ccw(c-9.734,10.8) -9.517,11.017 ccw(c-9.3,11.234) v1@-9.3,10.927 ; v1(-9.3,10.8) -9.687,11.187 -9.687,22.038 -4.059,27.667 -1.333,27.667 v1(-1,28) ; v1@-1.127,28 cw(c-1.434,28) -1.217,27.783 cw(c-1,27.566) v1@-1,27.873
LEDPOW: D6.2 U3.13 | length 27.8
  Top Layer w0.254: v1@-9.3,8.273 cw(c-9.3,7.966) -9.083,8.183 cw(c-8.866,8.4) v1@-9.173,8.4 ; v1(-9.3,8.4) -8.85,7.95 U3.13 ; D6.2 v1(-7.3,27.3) ccw(c-7.786,26.814) D6.2@-7.939,27.484 ; v1@-7.427,27.3 ccw(c-7.734,27.3) -7.517,27.517 ccw(c-7.3,27.734) v1@-7.3,27.427 ; v1@-7.423,27.267 ccw(c-7.719,27.188) -7.566,27.453 ccw(c-7.412,27.719) v1@-7.333,27.423
  Bottom Layer w0.254: v1@-9.427,8.4 ccw(c-9.734,8.4) -9.517,8.617 ccw(c-9.3,8.834) v1@-9.3,8.527 ; v1(-9.3,8.4) -10.906,10.006 -10.906,22.594 -7.3,26.2 v1(-7.3,27.3) ; v1@-7.39,27.21 cw(c-7.607,26.993) -7.3,26.993 cw(c-6.993,26.993) v1@-7.21,27.21
NetC5_1: C5.1 R2.1 R6.1 U1.4 | length 5.3
  Bottom Layer w0.508: R2.1 R6.1 C5.1 -0.975,1.4 U1.4 ; -1.523,1.4 cw(c-1.523,0.777) U1.4@-1.083,1.217
NetD1_1: D1.1 R12.1 S1.2 | length 33.1
  Top Layer w0.254: S1.2@-3.773,14.061 cw(c-2.888,14.061) -3.514,14.686 ; S1.2@-3.743,14.416 ccw(c-3.791,14.57) -3.63,14.57 ; S1.2@-3.519,14.061 cw(c-2.021,14.061) -3.08,15.12 ; S1.2@-3.517,14.416 cw(c-3.469,14.57) -3.63,14.57 ; S1.2@-3.265,14.061 cw(c-1.154,14.061) -2.647,15.553 ; S1.2@-3.011,14.061 cw(c-0.287,14.061) D1.1@-2.213,15.987 ; S1.2@-2.866,13.797 cw(c-2.229,13.16) -2.229,14.061 cw(c-2.229,14.961) S1.2@-2.866,14.324 ; S1.2@-2.757,14.061 cw(c0.581,14.061) D1.1@-1.779,16.421 ; D1.1@-2.273,16.5 cw(c-3.656,16.5) -2.678,15.522 cw(c-1.7,14.544) D1.1@-1.7,15.927 ; D1.1@-2.019,16.5 cw(c-2.789,16.5) -2.245,15.955 cw(c-1.7,15.411) D1.1@-1.7,16.181 ; D1.1@-1.7,16.5 -3.63,14.57 ; S1.2@2.866,13.797 ccw(c2.229,13.16) 2.229,14.061 ccw(c2.229,14.961) S1.2@2.866,14.324 ; 3.9,14.836 ccw(c4.816,14.836) S1.2@4.209,14.15 ; S1.2@4.377,14.34 cw(c5.316,15.4) 3.9,15.4 ; 5.749,17.249 ccw(c5.197,17.8) R12.1@5.977,17.8 ; R12.1@5.99,17.49 cw(c6.2,17.28) R12.1@6.2,17.577 ; R12.1 3.9,15.4 ; -3.63,14.57 -3.63,14.061 3.63,14.061 3.9,14.331 3.9,15.4
NetD1_2: D1.2 D2.2 D3.2 R8.1 | length 38
  Top Layer w0.254: D2.2 D3.2 1.9,20.4 2.1,20.6 8.9,20.6 9.6,21.3 R8.1 ; D2.2@-1.074,20.174 cw(c-0.53,19.63) -0.53,20.4 cw(c-0.53,21.17) D2.2@-1.074,20.626 ; D2.2@-0.895,19.995 cw(c0.083,19.017) 0.083,20.4 cw(c0.083,21.783) D2.2@-0.895,20.805 ; D3.2@0.895,19.995 ccw(c-0.083,19.017) -0.083,20.4 ccw(c-0.083,21.783) D3.2@0.895,20.805 ; D3.2@1.074,20.174 ccw(c0.53,19.63) 0.53,20.4 ccw(c0.53,21.17) D3.2@1.074,20.626 ; D1.2@1.295,17.305 ccw(c0.317,18.283) 1.7,18.283 ccw(c3.083,18.283) D1.2@2.105,17.305 ; D3.2@1.295,19.995 cw(c0.317,19.017) 1.7,19.017 cw(c3.083,19.017) 2.105,19.995 cw(c3.566,18.534) 3.566,20.6 ; D1.2@1.474,17.126 ccw(c0.93,17.67) 1.7,17.67 ccw(c2.47,17.67) D1.2@1.926,17.126 ; D3.2@1.474,20.174 cw(c0.93,19.63) 1.7,19.63 cw(c2.47,19.63) 1.926,20.174 cw(c2.953,19.147) 2.953,20.6 ; D1.2 D3.2@1.7,20.2 ; D3.2@2.105,20.805 ccw(c2.6,21.3) 2.6,20.6 ; R8.1@9.442,26.442 cw(c9.062,26.062) 9.6,26.062 cw(c10.138,26.062) R8.1@9.758,26.442
NetD2_1: D2.1 R13.1 S2.2 | length 29.3
  Top Layer w0.254: S2.2@-11.63,24.261 S2.2@-4.37,24.261 ; S2.2@-10.866,23.997 cw(c-10.229,23.36) -10.229,24.261 cw(c-10.229,25.161) S2.2@-10.866,24.524 ; S2.2@-5.134,23.997 ccw(c-5.771,23.36) -5.771,24.261 ccw(c-5.771,25.161) S2.2@-5.134,24.524 ; R13.1@-4.258,26.442 cw(c-4.638,26.062) -4.1,26.062 cw(c-3.562,26.062) R13.1@-3.942,26.442 ; S2.2@-4.195,24.261 cw(c-4.195,21.305) D2.1@-2.105,23.395 ; -4.1,25.103 ccw(c-3.028,25.103) S2.2@-3.786,24.345 ; -4.1,25.716 ccw(c-2.414,25.716) -3.606,24.524 ccw(c-2.97,25.161) -2.97,24.261 ; R13.1 -4.1,24.531 S2.2@-4.37,24.261 ; S2.2@-3.684,23.938 cw(c-3.377,23.407) -3.218,23.999 ; S2.2@-3.667,23.948 cw(c-3.065,23.021) -2.835,24.102 ; S2.2@-3.606,23.997 cw(c-2.97,23.36) -2.97,24.261 ; S2.2@-3.582,24.261 cw(c-3.582,21.918) D2.1@-1.926,23.574 ; S2.2@-3.557,24.464 ccw(c-2.973,24.843) -3.118,24.162 ; S2.2@-3.547,24.447 ccw(c-2.518,25.041) -2.826,23.894 ; D2.1@-2.356,24.261 cw(c-2.356,23.144) D2.1@-1.566,23.934 ; D2.1@-1.746,23.754 ccw(c-2.969,22.531) -2.969,24.261 ; D2.1 -1.961,24.261 S2.2@-4.37,24.261
NetD3_1: D3.1 R14.1 S3.2 | length 30.9
  Top Layer w0.254: D3.1 1.961,24.261 S3.2@4.37,24.261 ; D3.1@1.566,23.934 cw(c2.356,23.144) D3.1@2.356,24.261 ; D3.1@1.746,23.754 cw(c2.969,22.531) 2.969,24.261 ; D3.1@1.926,23.574 cw(c3.582,21.918) S3.2@3.582,24.261 ; D3.1@2.105,23.395 cw(c4.195,21.305) S3.2@4.195,24.261 ; 2.826,23.894 ccw(c2.518,25.041) S3.2@3.547,24.447 ; 2.835,24.102 cw(c3.065,23.021) S3.2@3.667,23.948 ; 3.118,24.162 ccw(c2.973,24.843) S3.2@3.557,24.464 ; 3.218,23.999 cw(c3.377,23.407) S3.2@3.684,23.938 ; S3.2@3.606,23.997 ccw(c2.97,23.36) 2.97,24.261 ; S3.2@3.606,24.524 cw(c2.97,25.161) 2.97,24.261 ; S3.2@4.106,24.524 ccw(c2.914,25.716) 4.6,25.716 ; S3.2@4.286,24.345 ccw(c3.528,25.103) 4.6,25.103 ; R14.1@4.442,26.442 cw(c4.062,26.062) 4.6,26.062 cw(c5.138,26.062) R14.1@4.758,26.442 ; R14.1 4.6,24.491 S3.2@4.37,24.261 ; S3.2@5.134,23.997 cw(c5.771,23.36) 5.771,24.261 cw(c5.771,25.161) S3.2@5.134,24.524 ; 6.719,24.261 ccw(c6.719,24.702) v1@7.031,24.39 ; v1(7.121,24.3) 7.161,24.261 S3.2@4.37,24.261 ; v1(10.2,24.3) S3.2@11.591,24.3 ; v1(10.2,24.3) cw(c10.2,23.418) S3.2@10.853,24.01 ; v1@10.264,24.19 cw(c10.417,23.924) 10.496,24.221 cw(c10.575,24.517) v1@10.31,24.363 ; v1@10.263,24.41 ccw(c10.472,24.771) 10.58,24.368 ; v1@10.29,24.21 cw(c10.507,23.993) 10.507,24.3 cw(c10.507,24.607) v1@10.29,24.39 ; v1@10.325,24.3 ccw(c10.325,25.066) S3.2@10.866,24.524
  Bottom Layer w0.305: v1(7.121,24.3) v1(10.2,24.3)
NetD4_2: D4.2 R21.2 | length 4.1
  Top Layer w0.254: D4.2@5.807,27.557 cw(c4.858,26.608) 6.2,26.608 ; D4.2@5.987,27.737 cw(c5.471,27.221) 6.2,27.221 ; D4.2@6,27.6 6.2,27.4 R21.2 ; R21.2@6.042,26.358 ccw(c5.662,26.738) 6.2,26.738 ccw(c6.738,26.738) R21.2@6.358,26.358
NetD5_1: D5.1 R23.2 | length 4.5
  Top Layer w0.254: R23.2@0.642,26.358 ccw(c-0.221,27.221) 1,27.221 ; R23.2 1,26.3 D5.1 ; D5.1@0.807,27.557 cw(c0.341,27.091) 1,27.091 cw(c1.659,27.091) D5.1@1.193,27.557 ; R23.2@0.822,26.178 ccw(c0.392,26.608) 1,26.608
NetD6_1: D6.1 R24.2 | length 4.5
  Top Layer w0.254: R24.2@-6.358,26.358 ccw(c-6.738,26.738) -6.2,26.738 ccw(c-5.662,26.738) R24.2@-6.042,26.358 ; R24.2 -6.2,27.8 D6.1 ; -6.2,26.608 cw(c-4.858,26.608) D6.1@-5.807,27.557 ; -6.2,27.221 cw(c-5.471,27.221) D6.1@-5.987,27.737
NetQ1_1: Q1.1 R1.2 R4.2 | length 15.2
  Top Layer w0.508: Q1.1@6.539,13.907 cw(c5.91,13.278) 6.8,13.278 ; Q1.1 6.966,14.334 10.334,14.334 11,15 15.8,15 R4.2 ; R1.2 Q1.1@6.8,14.135 ; 6.8,13.355 cw(c7.581,13.355) Q1.1@7.029,13.907 ; Q1.1@7.569,13.907 cw(c8.599,12.876) 8.599,14.334 ; R4.2@16.665,15.865 ccw(c16.331,16.2) R4.2@16.804,16.2
NetQ2_1: Q2.1 R8.2 R9.1 | length 8.8
  Top Layer w0.254: R8.2 R9.1 12.7,28.2 Q2.1 ; R8.2@9.858,28.042 cw(c10.238,27.662) 10.238,28.2 cw(c10.238,28.738) R8.2@9.858,28.358 ; R9.1@10.842,28.042 ccw(c10.462,27.662) 10.462,28.2 ccw(c10.462,28.738) R9.1@10.842,28.358 ; R9.1@11.311,28.393 ccw(c11.632,28.949) 11.798,28.329 ; R9.1@11.317,28.2 ccw(c11.317,29.783) Q2.1@12.436,28.664 ; R9.1@11.358,28.042 cw(c11.738,27.662) 11.738,28.2 cw(c11.738,28.738) R9.1@11.358,28.358 ; R9.1@11.393,28.089 cw(c11.77,27.871) 11.657,28.291 ; 11.93,28.2 ccw(c11.93,29.17) Q2.1@12.616,28.484
NetQ2_3: Q2.3 Q3.3 R4.1 | length 17.6
  Top Layer w0.254: Q3.3@14.545,17.115 ccw(c14.004,17.291) 14.406,17.694 ; Q2.3@14.545,27.285 cw(c14.004,27.109) 14.406,26.706 ; Q3.3@14.605,17.495 ccw(c14.9,17.791) Q3.3@14.9,17.373 ; Q2.3@14.605,26.905 cw(c14.9,26.609) Q2.3@14.9,27.027 ; Q2.3 14.406,26.706 ; Q3.3@15.3,17.373 ccw(c15.3,17.791) Q3.3@15.595,17.495 ; Q3.3@15.417,17.02 cw(c15.903,17.105) Q3.3@15.554,17.454 ; Q3.3@15.667,17.064 cw(c16.492,17.208) 15.9,17.8 ; R4.1@16.742,17.642 ccw(c16.362,17.262) 16.362,17.8 ccw(c16.362,18.338) R4.1@16.742,17.958 ; R4.1 15.9,17.8 ; 14.406,17.694 14.406,26.706 ; 14.406,17.694 Q3.3 15.9,17.8
NetQ3_1: Q3.1 R19.2 R20.1 | length 8.8
  Top Layer w0.254: R19.2 R20.1 12.7,17.8 Q3.1 ; R19.2@9.858,17.642 cw(c10.238,17.262) 10.238,17.8 cw(c10.238,18.338) R19.2@9.858,17.958 ; R20.1@10.842,17.642 ccw(c10.462,17.262) 10.462,17.8 ccw(c10.462,18.338) R20.1@10.842,17.958 ; R20.1@11.311,17.993 ccw(c11.632,18.549) 11.798,17.929 ; R20.1@11.317,17.8 ccw(c11.317,19.383) Q3.1@12.436,18.264 ; R20.1@11.358,17.642 cw(c11.738,17.262) 11.738,17.8 cw(c11.738,18.338) R20.1@11.358,17.958 ; R20.1@11.393,17.689 cw(c11.77,17.471) 11.657,17.891 ; 11.93,17.8 ccw(c11.93,18.77) Q3.1@12.616,18.084
NetR10_1: R10.1 R11.1 U2.7 | length 15.9
  Top Layer w0.254: v1@-13.633,28.877 cw(c-13.791,28.289) -13.263,28.593 ; v1@-13.633,28.877 cw(c-13.71,28.584) -13.447,28.736 cw(c-13.184,28.887) v1@-13.477,28.967 ; v1@-13.602,28.873 cw(c-13.609,28.554) -13.332,28.713 ; v1@-13.6,28.873 cw(c-13.6,28.566) -13.383,28.783 cw(c-13.166,29) v1@-13.473,29 ; R10.1@-13.497,28.305 ccw(c-14.017,28.583) v1(-13.6,29) -13.2,28.6 ; -13.358,28.758 cw(c-13.701,28.414) R10.1@-13.273,28.185 ; R10.1@-13.349,28.366 ccw(c-13.649,28.7) -13.2,28.7 ; R10.1 -13.2,28.6 ; R10.1@-13.115,28.515 cw(c-13.385,28.246) R10.1@-13.049,28.066 ; R10.1@-13.051,28.366 cw(c-12.751,28.7) -13.2,28.7 ; R11.1@-10.311,28.273 ccw(c-11.064,28.536) -10.5,29.1 ; -10.214,28.814 cw(c-10.639,28.388) R11.1@-10.071,28.19 ; R11.1@-10.117,28.39 ccw(c-10.247,28.6) -10,28.6 ; R11.1 -10,28.6 ; R11.1@-9.927,28.527 cw(c-10.215,28.24) R11.1@-9.831,28.106 ; R11.1@-9.883,28.39 cw(c-9.753,28.6) -10,28.6 ; -13.2,28.6 ccw(c-12.953,28.6) -13.083,28.39 cw(c-12.953,28.6) -13.2,28.6 ; -13.2,28.6 cw(c-13.447,28.6) -13.317,28.39 ccw(c-13.447,28.6) -13.2,28.6 ; -13.2,28.6 -13.2,28.7 ; -13.2,28.7 -12.8,29.1 -10.5,29.1 ; -10.5,29.1 -10,28.6
  Bottom Layer w0.305: U2.7@-14.828,28.279 ccw(c-14.94,28.6) -14.6,28.6 ; U2.7 -14.6,28.6 ; U2.7@-14.372,28.279 cw(c-14.26,28.6) -14.6,28.6 ; v1(-13.6,29) -14.2,29 -14.6,28.6
NetR21_1: R21.1 U4.1 | length 28.8
  Top Layer w0.254: R21.1@7.642,25.842 cw(c7.262,25.462) 7.8,25.462 cw(c8.338,25.462) R21.1@7.958,25.842 ; v1@7.71,23.69 ccw(c7.493,23.907) 7.8,23.907 ccw(c8.107,23.907) v1@7.89,23.69 ; v1(7.8,23.6) R21.1 ; v1@9.51,3.81 ccw(c9.897,4.197) 9.897,3.65 ; v1(9.6,3.9) 9.6,3.8 9.75,3.65 ; v1@9.69,3.99 ccw(c10.51,4.81) U4.1@10.51,3.65 ; v1@9.715,3.847 ccw(c9.873,3.773) 9.75,3.65 ; U4.1@10.478,3.528 ccw(c10.182,3.232) 10.182,3.65 ccw(c10.182,4.068) U4.1@10.478,3.772 ; U4.1 9.75,3.65
  Bottom Layer w0.254: v1@7.71,23.51 cw(c7.493,23.293) 7.8,23.293 cw(c8.107,23.293) v1@7.89,23.51 ; v1(7.8,23.6) 7.8,5.7 v1(9.6,3.9) ; v1@9.473,3.9 ccw(c9.166,3.9) 9.383,4.117 ccw(c9.6,4.334) v1@9.6,4.027
NetR22_2: R22.2 U4.5 | length 6.5
  Top Layer w0.254: U4.5@8.253,3.528 cw(c7.957,3.232) 8.375,3.232 cw(c8.793,3.232) U4.5@8.497,3.528 ; 8.375,2.513 ccw(c9.08,2.513) R22.2@8.61,1.988 ; 8.375,3.082 ccw(c9.589,3.082) R22.2@8.779,2.177 ; 8.375,2.525 ccw(c8.66,2.81) R22.2@8.75,2.417 ; R22.2@8.49,2.41 cw(c8.28,2.2) R22.2@8.577,2.2 ; 8.508,3.152 cw(c8.789,3.227) U4.5@8.67,3.492 ; R22.2 8.375,2.525 U4.5 ccw(c10.098,3.65) R22.2@8.949,2.366
NRST: C13.1 U3.7 | length 4
  Top Layer w0.254: C13.1 -10.85,4.45 ; C13.1@-11.172,4.222 ccw(c-11.95,5.001) -10.85,5.001 ; C13.1@-10.993,4.043 ccw(c-11.337,4.387) C13.1@-10.85,4.387 ; C13.1@-10.895,4.177 cw(c-10.682,4.282) -10.85,4.45 ; U3.7 -10.85,4.45
POWEN: R19.1 U3.11 | length 30.1
  Top Layer w0.254: U3.11 -8.85,7.35 -8.669,7.531 -5.569,7.531 -4.6,8.5 9.4,8.5 ; 8.811,8.5 ccw(c8.811,9.489) v1@9.51,8.79 ; R19.1@9.4,16.2 v1(9.6,16.2) ; 9.424,8.5 ccw(c9.424,8.876) v1@9.69,8.61 ; v1@9.473,8.693 cw(c9.222,8.678) 9.4,8.5 ; v1@9.593,8.573 ccw(c9.578,8.322) 9.4,8.5 ; v1(9.6,8.7) 9.4,8.5
  Bottom Layer w0.254: v1@9.51,8.79 ccw(c9.293,9.007) 9.6,9.007 ccw(c9.907,9.007) v1@9.69,8.79 ; v1@9.51,16.11 cw(c9.293,15.893) 9.6,15.893 cw(c9.907,15.893) v1@9.69,16.11 ; v1(9.6,8.7) v1(9.6,16.2)
SPARE1: U3.21
SPARE2: U3.22
SWCLK: J3.2 U3.37 | length 8.8
  Top Layer w0.254: J3.2@-16.7,18.727 cw(c-16.7,17.585) -15.893,18.393 cw(c-15.085,19.2) J3.2@-16.227,19.2 ; J3.2 -15.6,18.1 -15.6,13.7 U3.37 ; -15.6,14.085 ccw(c-14.715,14.085) U3.37@-15.341,13.459
SWDIO: J3.4 U3.34 | length 11.6
  Top Layer w0.254: J3.4@-16.7,22.727 cw(c-16.7,21.585) -15.893,22.393 cw(c-15.085,23.2) J3.4@-16.227,23.2 ; J3.4 -15.7,22.2 -15.7,20.775 -14.294,19.368 -14.294,18.439 -13.971,18.116 -13.971,17.349 -12.85,16.229 U3.34
TTL1_RX: U2.5 U3.31 | length 9.1
  Top Layer w0.254: v1@-13.99,22.41 cw(c-14.207,22.193) -13.9,22.193 cw(c-13.593,22.193) v1@-13.81,22.41 ; v1(-13.9,22.5) -13.9,20.771 -13.024,19.894 -13.024,18.965 -12.701,18.642 -12.701,17.875 -11.35,16.525 U3.31
TTL1_TX: U2.4 U3.30 | length 12.8
  Top Layer w0.254: v1@-12.19,18.31 cw(c-12.407,18.093) -12.1,18.093 cw(c-11.793,18.093) v1@-12.01,18.31 ; v1(-12.1,18.4) -12.1,17.849 -10.85,16.599 U3.30
  Bottom Layer w0.254: U2.4 -12.8,20 ; U2.4@-14.105,19.682 cw(c-13.38,19.013) -13.38,20 cw(c-13.38,20.987) U2.4@-14.105,20.318 ; U2.4@-13.918,19.51 cw(c-12.8,18.479) -12.8,20 ; U2.4@-13.918,20.49 ccw(c-12.8,21.521) -12.8,20 ; v1@-12.19,18.49 ccw(c-12.407,18.707) -12.1,18.707 ccw(c-11.793,18.707) v1@-12.01,18.49 ; v1(-12.1,18.4) -12.1,19.3 -12.8,20
VBUS: C8.1 D4.1 J2.1 U4.4 | length 39.7
  Top Layer w0.254: D4.1 8,27.4 8.6,26.8 ; D4.1@8.019,27.748 ccw(c8.72,27.677) 8.222,27.178 ; D4.1@8.272,27.722 ccw(c9.407,27.607) 8.6,26.8 ; U4.4 8.6,5.775 v1(8.6,6.9) ; U4.4@8.478,5.672 ccw(c8.182,5.968) 8.6,5.968 ccw(c9.018,5.968) U4.4@8.722,5.672 ; v1@8.51,6.81 cw(c8.293,6.593) 8.6,6.593 cw(c8.907,6.593) v1@8.69,6.81 ; v1@8.51,23.69 ccw(c8.293,23.907) 8.6,23.907 ccw(c8.907,23.907) v1@8.69,23.69 ; v1(8.6,23.6) 8.6,26.8
  Top Layer w0.508: J2.1 -1.3,6.9 -0.8,7.4 2.1,7.4 4.1,5.4 C8.1 6.65,5.55 U4.4 ; C8.1@6.683,5.367 cw(c7.123,4.927) 7.123,5.55
  Bottom Layer w0.254: v1@8.51,6.99 ccw(c8.293,7.207) 8.6,7.207 ccw(c8.907,7.207) v1@8.69,6.99 ; v1@8.51,23.51 cw(c8.293,23.293) 8.6,23.293 cw(c8.907,23.293) v1@8.69,23.51 ; v1(8.6,6.9) v1(8.6,23.6)
WAKEUP: R28.2 U3.10 | length 3.9
  Top Layer w0.254: U3.10 -9.35,5.25 -8.2,4.1 R28.2 ; -8.722,4.622 ccw(c-8,5.344) R28.2@-8,4.323
XTAL: U3.5
YL_EN: R15.1 U3.33 | length 16.7
  Top Layer w0.254: -15.268,25.173 cw(c-13.473,25.173) R15.1@-14.742,26.442 ; -15.268,25.786 cw(c-14.086,25.786) R15.1@-14.922,26.622 ; -15.268,26.004 cw(c-14.896,26.004) R15.1@-14.898,26.377 ; R15.1@-15.121,26.57 cw(c-15.635,26.499) -15.268,26.132 ; R15.1@-15.11,26.29 cw(c-14.9,26.08) R15.1@-14.9,26.377 ; R15.1 -15.268,26.132 ; U3.33 -12.35,16.339 -13.539,17.528 -13.539,18.295 -13.862,18.618 -13.862,19.547 -15.268,20.954 -15.268,26.132
YL_ENOUT: R5.1 R15.2 U2.3 | length 22.3
  Top Layer w0.254: v1(-17.1,27.3) -16.2,28.2 R15.2 -14,27.4 -12.1,27.4 ; v1@-17.1,27.427 ccw(c-17.1,27.734) -16.883,27.517 ccw(c-16.666,27.3) v1@-16.973,27.3 ; R15.2@-15.058,28.042 ccw(c-15.438,27.662) -15.438,28.2 ccw(c-15.438,28.738) R15.2@-15.058,28.358 ; R15.2@-14.7,27.977 cw(c-14.7,27.68) R15.2@-14.49,27.89 ; R15.2@-14.477,28.2 ccw(c-13.697,28.2) -14.249,27.649 ; R5.1@-11.914,28.136 cw(c-12.624,27.924) -12.1,27.4 ; -11.799,27.701 ccw(c-12.16,28.063) R5.1@-11.67,28.209 ; R5.1 -11.6,27.9 -12.1,27.4
  Bottom Layer w0.305: v1(-17.1,27.3) -17.632,26.768 -17.632,18.7 -17.132,18.2 -15.34,18.2 U2.3@-14.84,17.7
YL_SET: R10.2 U3.32 | length 14.3
  Top Layer w0.254: -13.751,26.049 ccw(c-14.303,26.6) R10.2@-13.523,26.6 ; R10.2@-13.51,26.29 cw(c-13.3,26.08) R10.2@-13.3,26.377 ; R10.2 -14.652,25.148 -14.652,20.948 -13.43,19.726 -13.43,18.796 -13.107,18.473 -13.107,17.707 -11.85,16.45 U3.32
pads on no net: J2.2 J2.3 J2.4 R28.1 U2.6 U2.8 U2.9 U3.2 U3.3 U3.4 U3.6 U3.18 U3.19 U3.20 U3.25 U3.26 U3.27 U3.28 U3.29 U3.38 U3.39 U3.40 U3.41 U3.42 U3.43 U3.45 U3.46

## Keep-outs
Keep-Out Layer:
  the board outline again, w0.127

## Silkscreen, mask and mechanical layers (free items; w line width, h text height)
Bottom Overlay:
  text "+" at -16.4,14.7 h1.02

## Dimensions
-17,30 to -16.5,0 on Top Overlay
-18,1.5 to 18,1 on Top Overlay